# EAGLE board Arm_V2 (EAGLE 9.6.2)
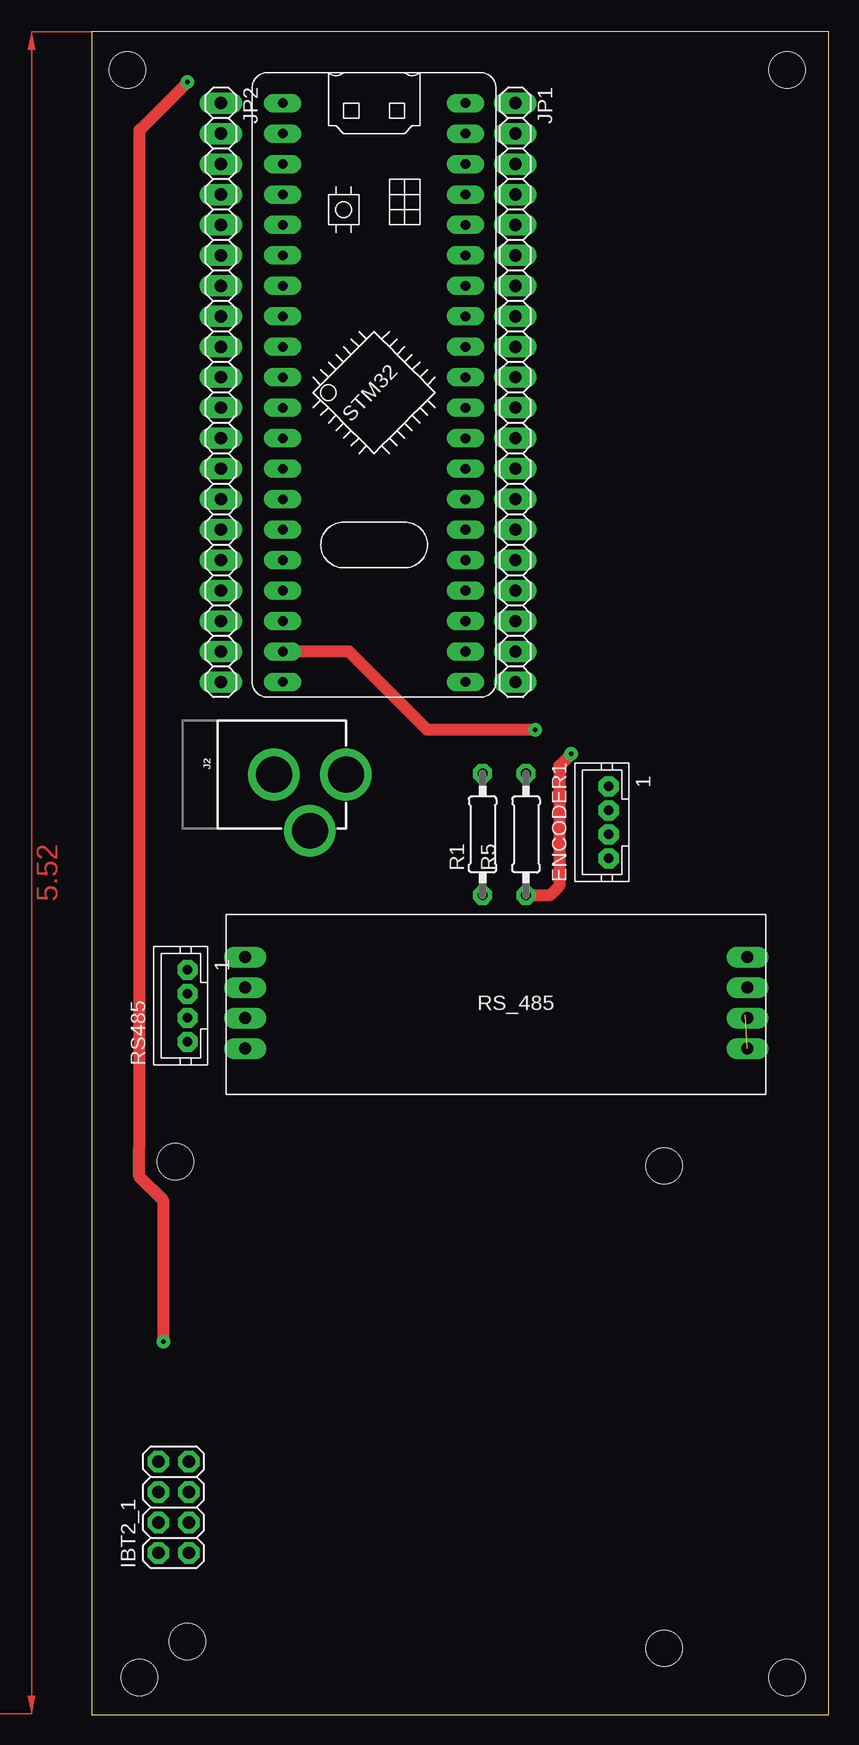
[diagram p0: board, top side]
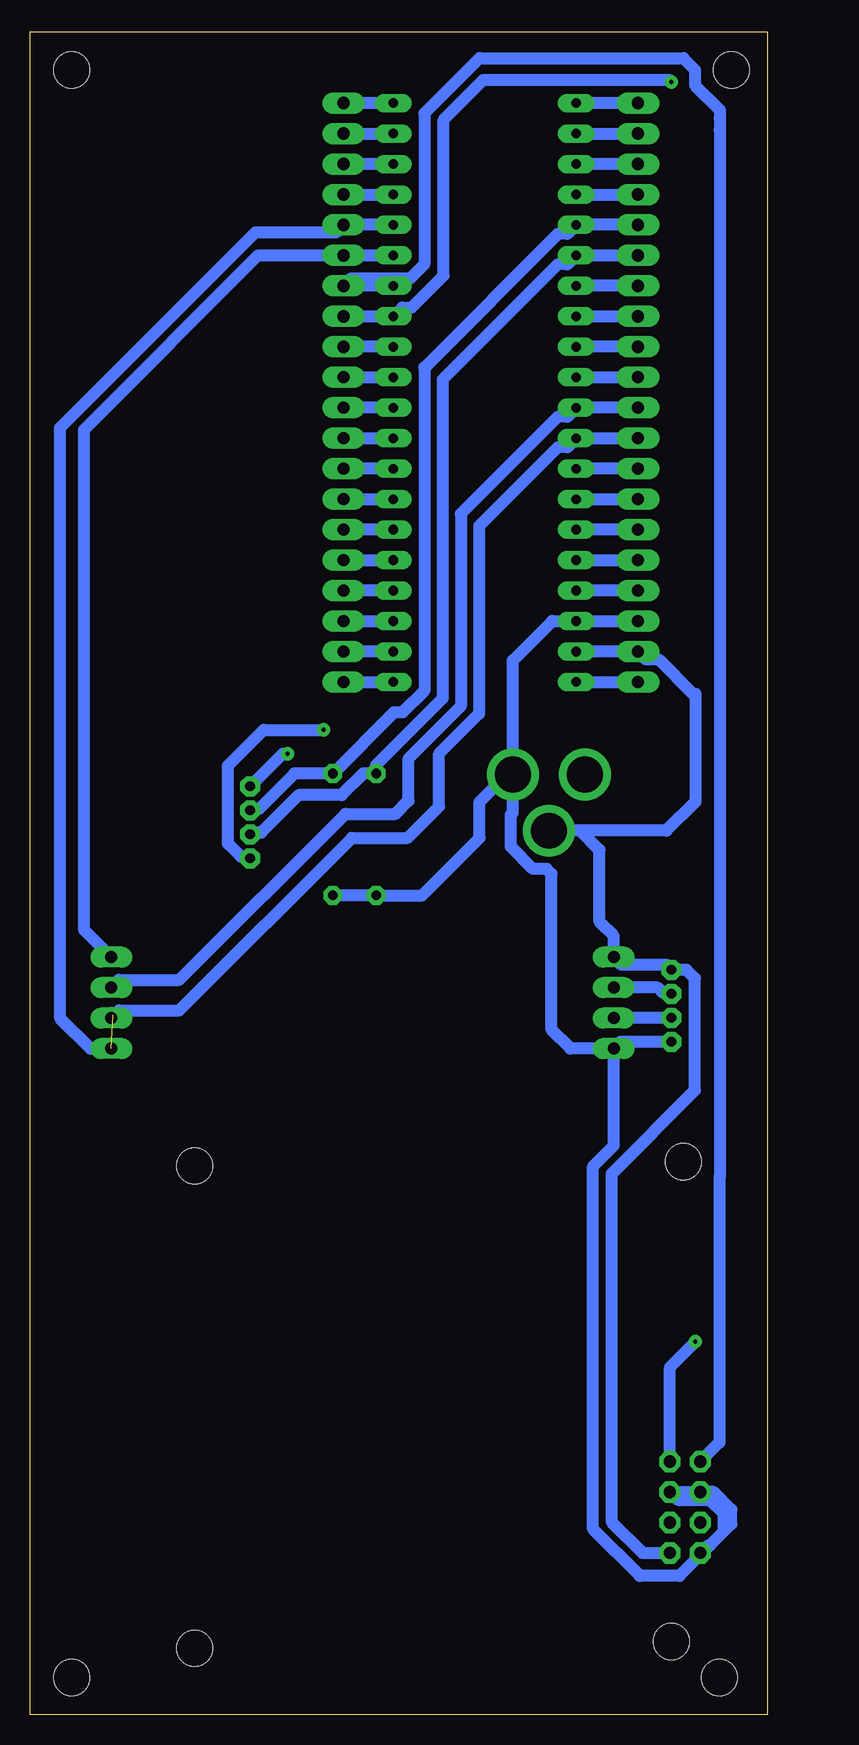
[diagram p1: board, bottom side, seen from below]

Size 61.48 x 140.29 mm. Coordinates in mm from the lower left corner, seen from the top.
Outline: 0,0 61.48,0 61.48,140.29 0,140.29 0,0
Copper layers (1*16): Top 0.035mm / dielectric 1.5mm / Bottom 0.035mm
Design rules "default *": minimum track width 40mil, minimum drill 0.35mm, track to track 20mil, track to pad 20mil, pad to pad 6mil, via to via 6mil, smd to smd 6mil, copper to edge 40mil, drill to drill 6mil, minimum pad ring 15mil, minimum via ring 15mil, stop-mask expansion 4mil, vias tented up to drill 0mil, thermal gap 10mil
Net classes: 0 default: width 1.016 mm, clearance 0.508 mm
Holes 3 mm at 47.75,45.73 47.75,5.53 7,46.08 3,137.08 8,6.08 58,137.08 58,3.08 4,3.08
tRestrict: area 7.5,5.5 to 47.8,45.7; area 4,12.1 to 7,22.1

## Footprints (pad centres in the part's own frame; a part is rotated, then mirrored left to right if it is on the bottom)
JST-PH4 = drill 0.813 pad 1.676 octagon: 1 3,0; 2 1,0; 3 -1,0; 4 -3,0
2X04 = drill 1.016 octagon: 1 -3.81,-1.27; 2 -3.81,1.27; 3 -1.27,-1.27; 4 -1.27,1.27; 5 1.27,-1.27; 6 1.27,1.27; 7 3.81,-1.27; 8 3.81,1.27
POWER_JACK = drill 2.997 pad 4.318: GND 0,7.7; GNDBREAK 4.7,10.7; PWR 0,13.7
1X20 = drill 1.016 long: 1 -24.13,0; 2 -21.59,0; 3 -19.05,0; 4 -16.51,0; 5 -13.97,0; 6 -11.43,0; 7 -8.89,0; 8 -6.35,0; 9 -3.81,0; 10 -1.27,0; 11 1.27,0; 12 3.81,0; 13 6.35,0; 14 8.89,0; 15 11.43,0; 16 13.97,0; 17 16.51,0; 18 19.05,0; 19 21.59,0; 20 24.13,0
0207/10 = drill 0.813 octagon: 1 -5.08,0; 2 5.08,0
BLUE_PILL = drill 0.8 long: P$1 -7.62,15.24; P$2 -7.62,12.7; P$3 -7.62,10.16; P$4 -7.62,7.62; P$5 -7.62,5.08; P$6 -7.62,2.54; P$7 -7.62,0; P$8 -7.62,-2.54; P$9 -7.62,-5.08; P$10 -7.62,-7.62; P$11 -7.62,-10.16; P$12 -7.62,-12.7; P$13 -7.62,-15.24; P$14 -7.62,-17.78; P$15 -7.62,-20.32; P$16 -7.62,-22.86; P$17 -7.62,-25.4; P$18 -7.62,-27.94; P$19 -7.62,-30.48; P$20 -7.62,-33.02; P$21 7.62,15.24; P$22 7.62,12.7; P$23 7.62,10.16; P$24 7.62,7.62; P$25 7.62,5.08; P$26 7.62,2.54; P$27 7.62,0; P$28 7.62,-2.54; P$29 7.62,-5.08; P$30 7.62,-7.62; P$31 7.62,-10.16; P$32 7.62,-12.7; P$33 7.62,-15.24; P$34 7.62,-17.78; P$35 7.62,-20.32; P$36 7.62,-22.86; P$37 7.62,-25.4; P$38 7.62,-27.94; P$39 7.62,-30.48; P$40 7.62,-33.02
RSS485PCB = drill 1 long: P$1 1.57,11.43; P$2 1.57,8.89; P$3 1.57,6.35; P$4 1.57,3.81; P$5 43.45,11.43; P$6 43.45,8.89; P$7 43.45,6.35; P$8 43.45,3.81

## Placement (x,y rotation side)
ENCODER1  [JST-PH4]  43.12,74.37 90 top
IBT2_1  [2X04]  6.85,17.28 90 top
J2  POWER_JACK  [POWER_JACK]  7.51,78.37 270 top
JP1  [1X20]  35.34,110.2 270 top
JP2  [1X20]  10.78,110.2 270 top
R1  [0207/10]  32.61,73.37 90 top
R5  [0207/10]  36.23,73.37 90 top
RS485  [JST-PH4]  8,59.08 90 top
U$1  [BLUE_PILL]  23.56,119.09 0 top
U$2  RS_485PCB  [RSS485PCB]  11.24,51.7 0 top

## Library data of the parts
ENCODER1 RS485 = jst-ph
IBT2_1 JP1 JP2 = pinhead
J2 = J-Generic-5.5mm-Barrel-Jack; DPN: CP-202A-ND; MPN: PJ-202A
R1 R5 = rcl; SPICEPREFIX: R
U$1 = BluePill
U$2 = RS_485PCB

## Nets
5V: ENCODER1.1 IBT2_1.2 IBT2_1.5 IBT2_1.6 J2.PWR JP2.18 R1.1 R5.1 RS485.4 U$1.P$18 U$2.P$4
GND: ENCODER1.4 IBT2_1.1 J2.GNDBREAK JP2.19 RS485.1 U$1.P$19 U$2.P$1
M1LPWM: IBT2_1.7 JP1.8 U$1.P$28
M1RPWM: IBT2_1.8 JP1.7 U$1.P$27
N$1: JP1.1 U$1.P$21
N$2: JP1.2 U$1.P$22
N$3: JP1.3 U$1.P$23
N$4: JP1.4 U$1.P$24
N$5: JP1.9 U$1.P$29
N$6: J2.GND
N$7: JP1.10 U$1.P$30
N$8: JP2.14 U$1.P$14
N$9: JP2.15 U$1.P$15
N$10: RS485.2 U$2.P$2
N$11: JP1.11 U$1.P$31
N$12: JP1.12 U$1.P$32
N$13: JP1.13 U$1.P$33
N$14: JP1.14 U$1.P$34
N$15: JP1.15 U$1.P$35
N$16: JP1.16 U$1.P$36
N$17: JP1.17 U$1.P$37
N$18: JP1.18 U$1.P$38
N$19: JP1.19 U$1.P$39
N$20: JP1.20 U$1.P$40
N$21: JP2.1 U$1.P$1
N$22: JP2.2 U$1.P$2
N$23: JP2.3 U$1.P$3
N$24: JP2.4 U$1.P$4
N$25: RS485.3 U$2.P$3
N$27: JP2.7 U$1.P$7
N$28: JP2.8 U$1.P$8
N$29: JP2.9 U$1.P$9
N$30: JP2.10 U$1.P$10
N$33: JP2.13 U$1.P$13
N$36: JP2.16 U$1.P$16
N$37: JP2.17 U$1.P$17
N$40: JP2.20 U$1.P$20
PA8: ENCODER1.2 JP2.5 R5.2 U$1.P$5
PA9: ENCODER1.3 JP2.6 R1.2 U$1.P$6
PB3: JP2.11 U$1.P$11 U$2.P$6
PB4: JP2.12 U$1.P$12 U$2.P$7
PB10: JP1.6 U$1.P$26 U$2.P$5
PB11: JP1.5 U$1.P$25 U$2.P$8

## Tracks (layer width: path | path; a pad name or v marks a point on that pad's centre or on a via)
5V  (via drill 0.35)
  Top 1.016: v40,80.08 39,79.08 39,69.08 38.21,68.29 R5.1
  Bottom 1.016: JP2.18 U$1.P$18 17.93,91.15 21.21,87.87 J2.PWR | R5.1 R1.1 28.79,68.29 24,73.08 24,76.08 21.71,78.37 J2.PWR | J2.PWR 21.21,75.16 21.39,74.98 21.39,72.35 19.52,70.5 18.41,70.5 18,70.08 18,57.08 16.43,55.51 U$2.P$4 | ENCODER1.1 40.41,80.08 v40,80.08 | RS485.4 12.24,56.08 U$2.P$4 | IBT2_1.2 4.95,14.1 4.79,14.1 | 3.67,15.22 3,15.9 3,17.08 4.47,18.55 IBT2_1.6 IBT2_1.5 7.48,17.91 4.79,17.91 3.67,16.8 3.67,15.22 | 3.67,15.22 4.79,14.1 | U$2.P$4 12.81,47.42 14.52,45.71 14.52,15.45 10.64,11.56 7.33,11.56 4.79,14.1
GND  (via drill 0.35)
  Top 1.016: v37,82.08 28,82.08 21.47,88.61 U$1.P$19
  Bottom 1.016: U$1.P$19 JP2.19 10.14,87.97 9.1,87.97 6.21,85.08 6,85.08 6,76.08 8.41,73.67 J2.GNDBREAK 15.59,73.67 14,72.08 14,66.08 12.81,64.89 U$2.P$1 12.17,62.49 8.41,62.49 RS485.1 6.74,62.08 6.03,61.38 6.03,52.05 13,45.08 13,16.08 10.39,13.47 IBT2_1.1 | ENCODER1.4 43.27,71.52 43.89,71.52 44.97,72.6 44.97,79.11 42,82.08 v37,82.08
M1LPWM  (via drill 0.35)
  Top 1.016: v8,136.08 4,132.08 4,47.36 3.98,47.33 3.98,44.83 6,42.8 v6,31.08
  Bottom 1.016: JP1.8 U$1.P$28 30.44,117.29 29.66,117.29 27,119.95 27,132.93 23.69,136.24 8.15,136.24 v8,136.08 | 8.12,21.24 IBT2_1.7 8.12,28.96 v6,31.08
M1RPWM
  Bottom 1.016: U$1.P$27 JP1.7 34.7,119.72 29.76,119.72 28.6,120.89 28.6,133.48 24,138.08 7,138.08 6.02,137.1 6.02,135.83 3.98,133.78 3.98,133.06 3.98,132.08 3.98,44.83 4,44.8 4,22.67 IBT2_1.8
N$1
  Bottom 1.016: U$1.P$21 JP1.1
N$2
  Bottom 1.016: JP1.2 U$1.P$22
N$3
  Bottom 1.016: U$1.P$23 JP1.3
N$4
  Bottom 1.016: JP1.4 U$1.P$24
N$5
  Bottom 1.016: U$1.P$29 JP1.9
N$7
  Bottom 1.016: JP1.10 U$1.P$30
N$8
  Bottom 1.016: U$1.P$14 JP2.14
N$9
  Bottom 1.016: JP2.15 U$1.P$15
N$10
  Bottom 1.016: RS485.2 8.15,60.23 8.77,60.23 9.13,60.59 U$2.P$2
N$11
  Bottom 1.016: U$1.P$31 JP1.11
N$12
  Bottom 1.016: JP1.12 U$1.P$32
N$13
  Bottom 1.016: U$1.P$33 JP1.13
N$14
  Bottom 1.016: JP1.14 U$1.P$34
N$15
  Bottom 1.016: U$1.P$35 JP1.15
N$16
  Bottom 1.016: JP1.16 U$1.P$36
N$17
  Bottom 1.016: U$1.P$37 JP1.17
N$18
  Bottom 1.016: JP1.18 U$1.P$38
N$19
  Bottom 1.016: U$1.P$39 JP1.19
N$20
  Bottom 1.016: JP1.20 U$1.P$40
N$21
  Bottom 1.016: JP2.1 U$1.P$1
N$22
  Bottom 1.016: U$1.P$2 JP2.2
N$23
  Bottom 1.016: JP2.3 U$1.P$3
N$24
  Bottom 1.016: U$1.P$4 JP2.4
N$25
  Bottom 1.016: RS485.3 12.78,58.08 U$2.P$3
N$27
  Bottom 1.016: JP2.7 U$1.P$7
N$28
  Bottom 1.016: U$1.P$8 JP2.8
N$29
  Bottom 1.016: JP2.9 U$1.P$9
N$30
  Bottom 1.016: U$1.P$10 JP2.10
N$33
  Bottom 1.016: JP2.13 U$1.P$13
N$36
  Bottom 1.016: U$1.P$16 JP2.16
N$37
  Bottom 1.016: JP2.17 U$1.P$17
N$40
  Bottom 1.016: U$1.P$20 JP2.20
PA8
  Bottom 1.016: JP2.5 U$1.P$5 16.68,123.43 17.46,123.43 28.6,112.29 28.6,85.33 30.4,83.53 31.15,83.53 R5.2 39.42,78.45 42.35,75.52 42.97,75.52 ENCODER1.2
PA9
  Bottom 1.016: JP2.6 U$1.P$6 16.68,120.89 17.46,120.89 27.08,111.27 27.08,84.69 32.61,79.16 R1.2 33.68,78.45 35.48,76.65 39.07,76.65 42.2,73.52 42.97,73.52 ENCODER1.3
PB3
  Bottom 1.016: JP2.11 U$1.P$11 16.68,108.19 17.46,108.19 25.55,100.1 25.55,84.06 29.91,79.71 29.91,76.17 31,75.08 35.18,75.08 49.02,61.23 54.05,61.23 U$2.P$6
PB4
  Bottom 1.016: JP2.12 U$1.P$12 16.68,105.65 17.46,105.65 24.03,99.08 24.03,83.43 27.37,80.09 27.37,75.71 30,73.08 34.64,73.08 49.02,58.69 54.05,58.69 U$2.P$7
PB10
  Bottom 1.016: U$1.P$26 JP1.6 42.45,121.63 57,107.08 57,65.44 U$2.P$5
PB11  (1 unrouted)
  Bottom 1.016: U$1.P$25 JP1.5 35.98,123.53 42.7,123.53 59,107.23 59,58.08 56.43,55.51 U$2.P$8 55.71,55.51 | 54.52,58.32 54.69,58.49
(copper drawn outside any net)
  shapes: Top area x2

## Text on the board
tDocu: Shafayet Sadik Sowad | Safwan Sami | Fabbiha Bushra